# Altium PCB probe.PcbDoc
Units mil, origin at the board's own origin, x right, y up, seen from the top; angles counter-clockwise.
Board outline 629.92 x 1850.39 mil, 4 copper layers (Top Layer, Internal Plane 1, Internal Plane 2, Bottom Layer), stack 29.834 mil thick; 42 components, 18 nets, 114 pads, 94 vias.
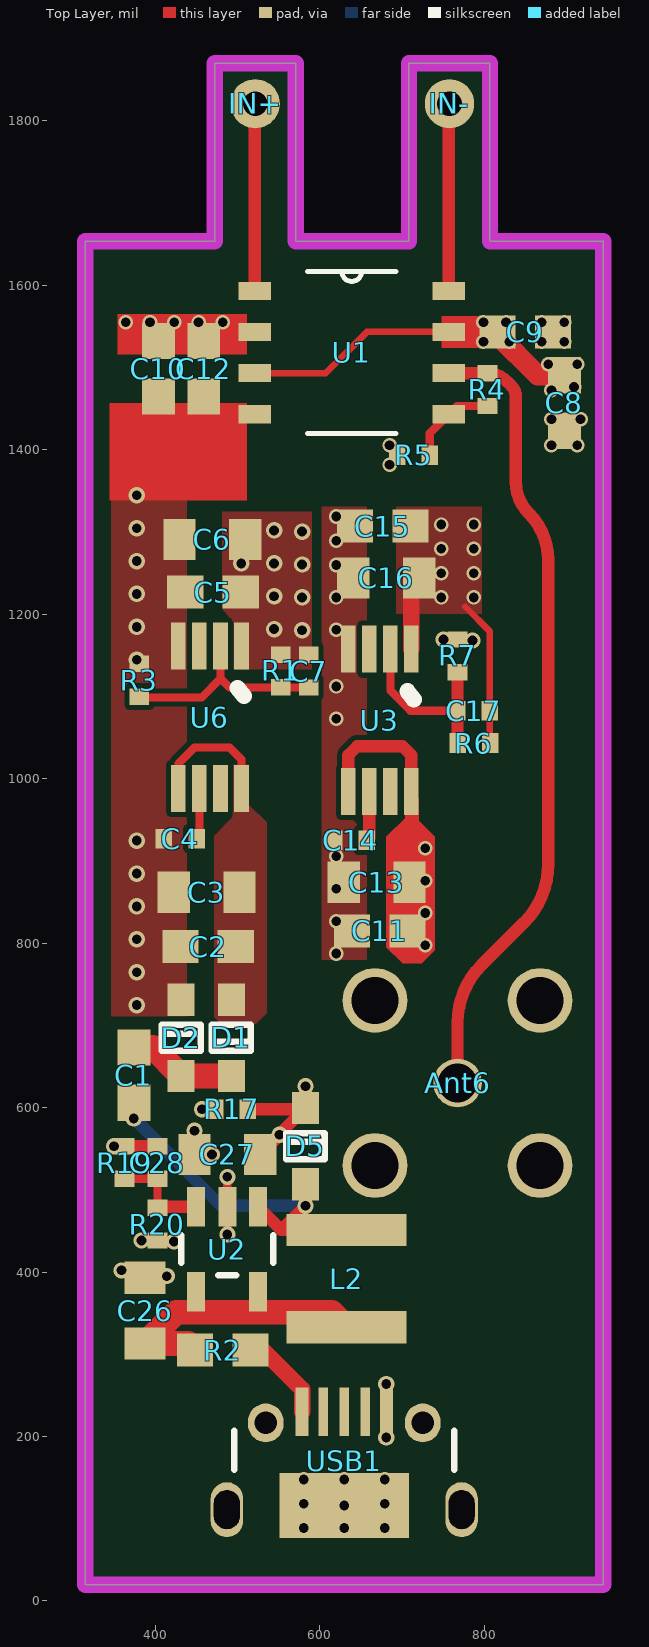
[diagram p0: Top Layer view]
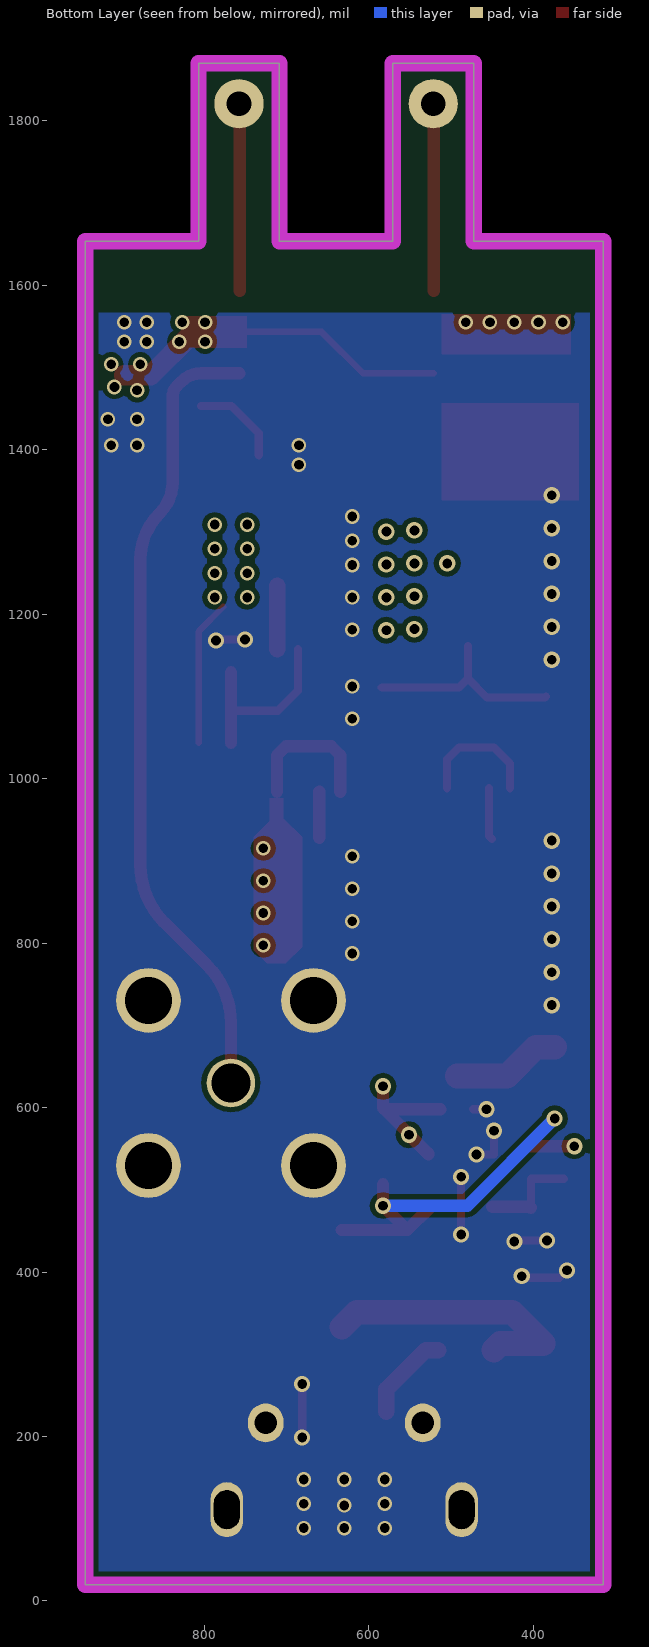
[diagram p1: Bottom Layer view, seen from below]
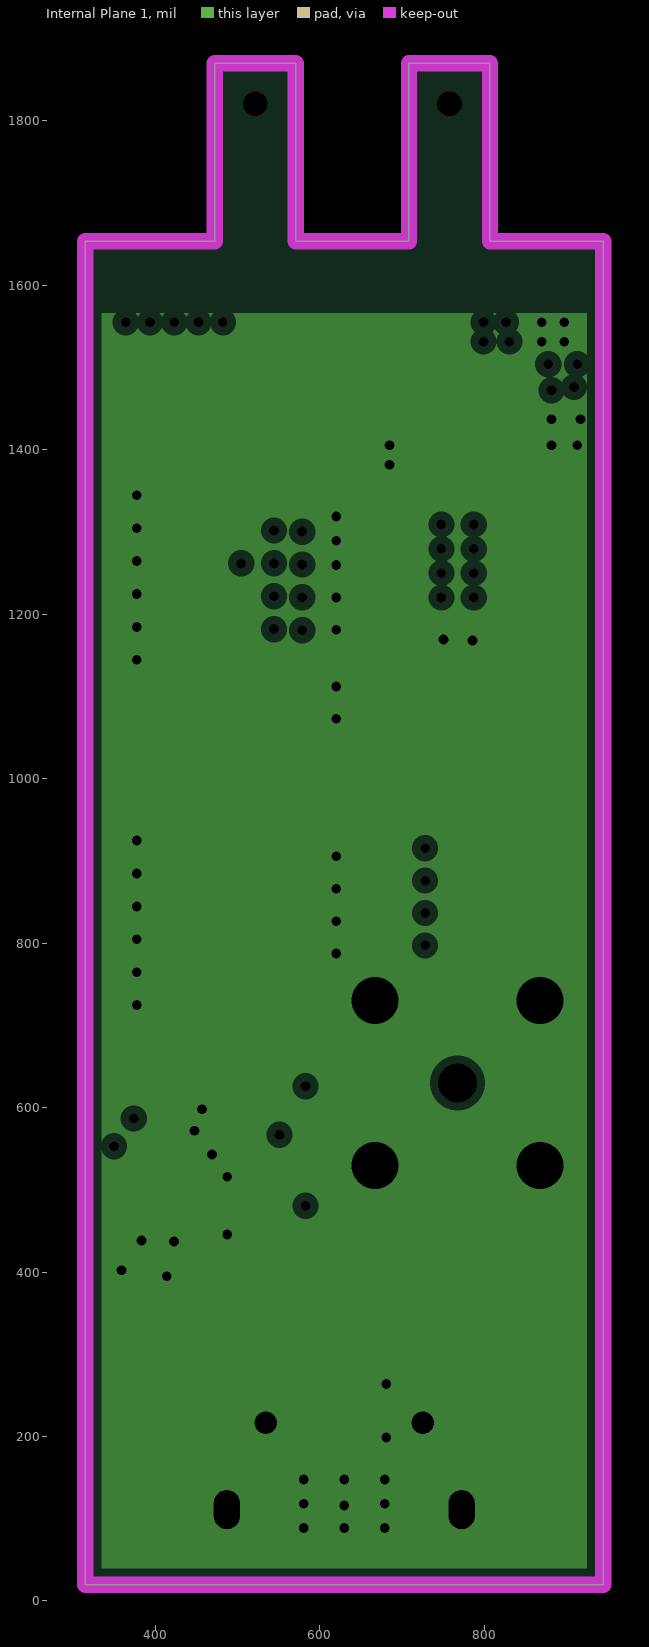
[diagram p2: Internal Plane 1, clearances drawn from the general rule]
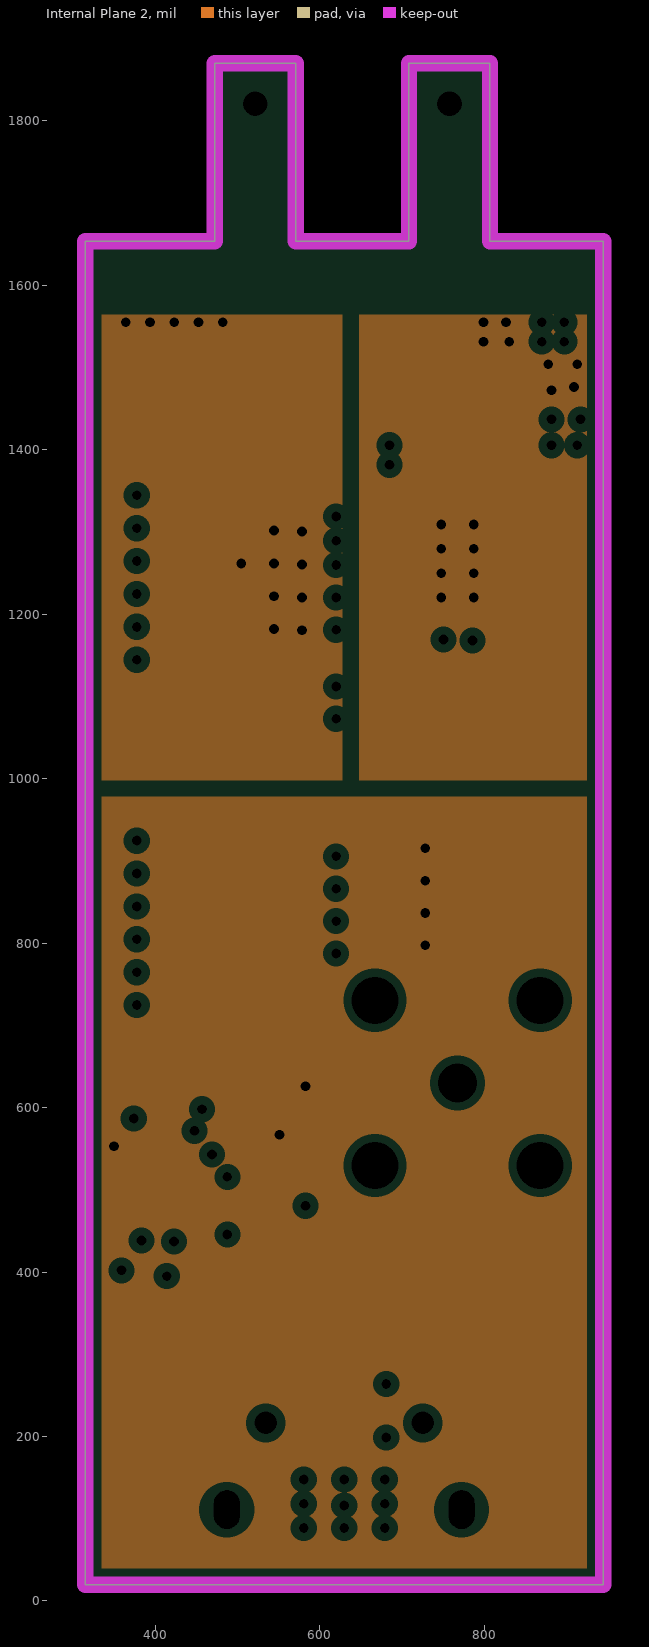
[diagram p3: Internal Plane 2, clearances drawn from the general rule]

## Layer stack, top to bottom
Top Solder: solder mask 0.4, Solder Resist, Dk 3.8
Top Layer: signal copper 1.4
Dielectric 1: prepreg 7.1, Dk 4.6
Internal Plane 1: plane copper 1.417, net GND
Dielectric 3: core 10, Dk 4.6
Internal Plane 2: plane copper 1.417, net (Multiple Nets)
Dielectric 4: prepreg 7.1, Dk 4.6
Bottom Layer: signal copper 1.4
Bottom Solder: solder mask 0.4, Solder Resist, Dk 3.8

## Board outline
314.96,19.68 314.96,1653.54 472.44,1653.54 472.44,1870.08 570.87,1870.08 570.87,1653.54 708.66,1653.54 708.66,1870.08 807.09,1870.08 807.09,1653.54 944.88,1653.54 944.88,19.68

## Design rules (kind name [scope] priority, off if disabled: settings)
Clearance [All] p1: gap=6 ignorepadtopadclearanceinfootprint=FALSE except(0: Arc-Hole Track-Hole SMDPad-Hole THPad-Hole Via-Hole Fill-Hole Poly-Hole Region-Hole Text-Hole)
DiffPairsRouting [All] p1: maxlimit=10 minlimit=10 mostfreqgap=10 toplayer_minwidth=5.98 toplayer_maxwidth=15 toplayer_prefwidth=15 bottomlayer_minwidth=5.98 bottomlayer_maxwidth=15 bottomlayer_prefwidth=15 maxuncoupledlength=500
MinimumSolderMaskSliver [All] p1 off: minsoldermaskwidth=10
PlaneClearance [All] p1: clearance=10
PlaneConnect [All] p1: planeconnectstyle=Direct reliefexpansion=20 reliefentries=4 reliefconductorwidth=10 reliefairgap=10
PolygonConnect [All] p1: connectstyle=Direct reliefconductorwidth=10 reliefentries=4 polygonreliefangle="90 Angle" airgapwidth=10
RoomDefinition ad8130 [InComponentClass('ad8130')] p1 off: confinementstyle=ConfineIn formatcopy=TRUE lockcomponents=FALSE outline -2997.76,-3067.09 -997.76,-3067.09 -997.76,-2067.09 -2997.76,-2067.09
RoomDefinition power [InComponentClass('power')] p2 off: confinementstyle=ConfineIn formatcopy=TRUE lockcomponents=FALSE outline 2012.24,72.91 4357.24,72.91 4357.24,312.91 2012.24,312.91
RoutingVias [All] p1: holewidth=12 width=20 viastyle="Through Hole" minholewidth=11.81 minwidth=19.68 maxholewidth=28 maxwidth=50
SilkToBoardRegionClearance [All] p1 off:
SilkToSilkClearance [All] p1 off: silktosilkclearance=10
SilkToSolderMaskClearance [IsPad] p1 off: minsilkscreentomaskgap=10 clearancetoexposedcopper=TRUE
SolderMaskExpansion [All] p1: expansion=4
Width [All] p1: maxlimit=60 minlimit=6 preferedwidth=6
23 further rules are at their usual default settings.

## Classes and differential pairs
component class ad8130: Ant6 IN+ IN- R4 R5 U1
component class power: C1 C2 C3 C4 C5 C6 C7 C8 C9 C10 C11 C12 C13 C14 C15 C16 C17 C26 C27 C28 D1 D2 D5 L2 R1 R2 R3 R4 R6 R7 R17 R19 R20 U2 U3 U6 USB1

## Components (designator, comment, footprint, x,y, rotation, side; value= is the part's Value field where it differs from the comment)
Ant6 "Antenna" SMA-HOLE 767.72,629.92 r0 top
C1 "1uF" 0603 374.02,639.76 r270 top
C2 "0.1uF" 0603 464.61,795.89 r180 top
C3 "10uF" 0805 462.61,861.89 r0 top
C4 "10nF" 0402 430.61,926.89 r180 top
C5 "0.1uF" 0603 470.61,1226.89 r180 top
C6 "10uF" 0805 469.61,1290.89 r0 top
C7 "10nF" 0402 586.61,1130.89 r270 top
C8 "2.2uF" 0603 897.64,1456.69 r90 top
C9 "2.2uF" 0603 850.39,1543.31 r180 top
C10 "2.2uF" 0603 404.02,1498.27 r90 top
C11 "0.1uF" 0603 673.23,814.96 r180 top
C12 "2.2uF" 0603 459.02,1498.27 r90 top
C13 "10uF" 0805 669.29,874.02 r0 top
C14 "10nF" 0402 637.8,925.2 r180 top
C15 "0.1uF" 0603 677.17,1307.09 r180 top
C16 "10uF" 0805 681.1,1244.09 r0 top
C17 "10nF" 0402 787.4,1082.68 r180 top
C26 "2.2uF" 0805 387.76,353.03 r270 top
C27 "2.2uF" 0805 487.76,543.03 r0 top
C28 "470pf" 0402 402.76,533.03 r90 top
D1 "Diode 1N4148" LC-SOD-323 492.61,684.89 r90 top
D2 "Diode 1N4148" LC-SOD-323 431.61,684.89 r270 top
D5 "Diode 1N4148" LC-SOD-323 582.76,553.03 r270 top
IN+ "TestPad" TestPad 521.65,1820.87 r90 top
IN- "TestPad" TestPad 757.87,1820.87 r90 top
L2 "Inductor Iron Dot" L4015 632.76,333.03 r90 top value=10uH
R1 "17k" 0402 552.61,1130.89 r90 top
R2 "FB" 0603 482.28,305.12 r180 top
R3 "10k" 0402 380.61,1119.89 r270 top
R4 "0R" 0402 804.02,1473.27 r270 top
R5 "NC" 0402 714.02,1393.27 r0 top
R6 "17k" 0402 787.4,1043.31 r0 top
R7 "10k" 0402 767.72,1149.61 r270 top
R17 "" 0402 492.76,598.03 r0 top value=10k
R19 "" 0402 362.76,533.03 r90 top value=10k
R20 "" 0402 402.76,458.03 r90 top value=10k
U1 "AD8130" SO8 639.02,1518.27 r0 top
U2 "LM27313XMF/NOPB" SOT23-5 487.76,428.03 r180 top value=Value
U3 "tps7a4901" MSOP8/VSSOP8 673.23,1070.87 r270 top
U6 "tps7a3001" MSOP8/VSSOP8 466.61,1074.89 r270 top
USB1 "USB Micro Type B" MICRO-YZX 629.92,0 r0 top

## Footprints (in the part's own frame and the unit in brackets; to place one, negate y for a bottom-side part, rotate by r counter-clockwise, add the part's x,y. Pads: shape width x height; smd on the part's side, far side on the other; paste and mask are expansions set on the pad)
0402 [mil] "0402-RES"
  rect 20x24 smd: 1(-19.69,0) 2(20,0)
0603 [mil] "0603-RES"
  rect 44x40 smd: 1(-33.46,0) 2(34,0)
0805 [mil]
  rect 39.37x50 smd: 1(-40,0) 2(40,0)
  body extent -50,-30 50,30, height 31
L4015 [mm]
  rect 1x3.7 smd: 1(0,0) 2(3,0)
LC-SOD-323 [mm]
  rect 1x0.83 smd: 1(1.18,0) 2(-1.18,0)
  silkscreen extent -0.4,-0.6 0.4,0.6, body extent -1.35,-0.62 1.35,0.63, height 1.1
MICRO-YZX [mm]
  rect 0.4x1.5 smd: 1(-1.3,5.85) 5(1.3,5.85)
  rect 0.3x1.5 smd: 2(-0.65,5.85) 3(0,5.85) 4(0.65,5.85)
  oval 1x1.7 hole 0.8 slot 1.2 at 90 deg: 5(-3.625,2.82) 5(3.625,2.82)
  oval 1.1x1.2 hole 0.7: 5(-2.425,5.5) 5(2.425,5.5)
  rect 4x2 smd: 5(0,2.95)
  silkscreen extent -3.4,4.05 3.4,5.25, body extent -4.02,0.33 3.98,5.93, height 2.6
MSOP8/VSSOP8 [mm]
  rect 1.45x0.45 smd: 1(-2.2,0.975) 2(-2.2,0.325) 3(-2.2,-0.325) 4(-2.2,-0.975) 5(2.2,-0.975) 6(2.2,-0.325) 7(2.2,0.325) 8(2.2,0.975)
  silkscreen extent -0.9,0.85 -0.65,1.05
SMA-HOLE [mm]
  round 1.5 hole 1.2: 1(0,0)
  round 2 hole 1.45: GND(-2.55,-2.55) GND(-2.55,2.55) GND(2.55,-2.55) GND(2.55,2.55)
SO8 [mm]
  rect 1x0.559 smd: 1(-3,1.905) 2(-3,0.635) 3(-3,-0.635) 4(-3,-1.905) 5(3,-1.905) 6(3,-0.635) 7(3,0.635) 8(3,1.905)
  silkscreen extent -1.37,-2.5 1.37,2.5, body extent -3,-2.45 3,2.45, height 1.63
SOT23-5 [mil] "SOT23-5"
  rect 22x48 smd: 1(-37.4,-51.19) 2(0,-51.19) 3(38,-51.19) 4(38,52) 5(-37.4,52)
  silkscreen extent -56,-17 56,32
TestPad [mil]
  round 60 hole 30: 1(0,0)

## Part data
C1 C2 C3 C4 C5 C6 C7 C11 C13 C14 C15 C16 C17: library part Cap, "Capacitor", LatestRevisionDate=17-Jul-2002, LatestRevisionNote="Re-released for DXP Platform.", PackageDescription="Radial Cap, Thru-Hole; 2 Leads; 0.3 in Pin Spacing", PackageReference=RAD-0.3, Published=8-Jun-2000, Publisher="Altium Limited"
C8 C9 C10 C12 C26 C27 C28: library part CAP0402-CAP, "<b>Capacitor</b> / Standard 0603 ceramic capacitor, and 0.1\" leaded capacitor.", PARTNO=CC0402ZRY5V7BB104
D1 D2 D5: "High Conductance Fast Diode", Code_JEDEC=DO-204-AH, ComponentLink1Description="Manufacturer Link", ComponentLink1URL=http://www.fairchildsemi.com/, ComponentLink2Description=Datasheet, ComponentLink2URL=http://www.fairchildsemi.com/ds/1N%2F1N4148.pdf, DatasheetVersion=1997, LatestRevisionDate=17-Jul-2002, LatestRevisionNote="Re-released for DXP Platform.", PackageDescription="Diode, Axial; Body 3.8 x 1.9 mm (LxDia. max), Lead Dia. 0.53 mm (max)", PackageReference=DO-35, Published=8-Jun-2000, Publisher="Altium Limited"
L2: "Magnetic-Core Inductor with Winding Polarity Marking", LatestRevisionDate=17-Jul-2002, LatestRevisionNote="Re-released for DXP Platform.", PackageDescription="Diode; 2 Leads", PackageReference=DIODE_SMC, Published=24-Mar-1999, Publisher="Altium Limited"
R1 R2 R3 R4 R5 R6 R7 R17 R19 R20: library part Res2, "Resistor", LatestRevisionDate=17-Jul-2002, LatestRevisionNote="Re-released for DXP Platform.", PackageDescription="Axial Device, Thru-Hole; 2 Leads; 0.4 in Pin Spacing", PackageReference=AXIAL-0.4, Published=8-Jun-2000, Publisher="Altium Limited"
U2: "Imported", Manufacturer="Texas Instruments", CompType=IC, MountType=SMT, PackageReference=DBV0005A, PartNumber=LM27313XMF/NOPB, PIN_COUNT=5, RefDes=RefDes, RoHS=Y, Type=DEV
U3: library part tps7a3001
USB1: library part USB_Micro_TypeB, "Connector SMD USB Micro Type B middle mount", Manufacturer 1="Molex Inc", Manufacturer Part Number 1=47491-0001, Package / Case=SMD, Supplier Part Number 1=WM17142CT-ND, SCDType=undef, Supplier 1=Digi-Key

## Via types
v1: diameter 17.72, hole 11.81, Top Layer to Bottom Layer, 55 vias
v2: diameter 20, hole 12, Top Layer to Bottom Layer, tented both sides, 21 vias
v3: diameter 19.68, hole 11.81, Top Layer to Bottom Layer, 18 vias

## Nets (pads, with @x,y where several pads share a name; then routed paths per layer and width w, separated by ;. In a path a pad name is that pad's centre, name@x,y a point inside that pad or via, vN(x,y) a via of type N, cw(c..) or ccw(c..) an arc to the next point about the centre after c; other vN are vias at no path point)
5V: C8.2 C9.2 C15.1 C16.2 C17.1 R6.2 U1.3 U1.7 U3.1 | length 617.2
  Top Layer w8: U1.3 607.44,1493.27 657.48,1543.31 757.09,1543.31 U1.7 ; 777,1209 807.09,1178.91 C17.1 R6.2@807.09,1043.62
  Top Layer w20: U3.1 C16.2@711.61,1234.61
  Top Layer w25: C9.2 816.39,1539.51 865.21,1490.69 C8.2
  other v1: 748.03,1220.47 787.4,1220.47 748.03,1250 787.4,1250 748.03,1279.53 787.4,1279.53 748.03,1309.06 787.4,1309.06 881.89,1472.44 909.45,1476.38 877.95,1503.94 913.39,1503.94 799.21,1531.5 830.71,1531.5 799.21,1555.12 826.77,1555.12
6V: C11.1 C13.2 C27.2 C28.2 D5.2 R17.2 R19.2 U3.5 U3.8 | length 433.4
  Top Layer w15: v3(350.03,553.03) R19.2 C28.2 ; R17.2 D5.2@581.3,598.03 ; C27.2 551.18,566.46 v3(551.18,566.93) ; C27.2@527.76,544.49 D5.2@581.3,598.03 ; v3(582.76,625.91) D5.2 D5.2@581.3,598.03 ; U3.5 634.84,1028.54 645.67,1039.37 700.79,1039.37 711.61,1028.54 U3.8
  other v1: 728.35,797.24 728.35,836.61 728.35,875.98 728.35,915.35
-3.3V: C5.1 C6.2 C7.1 C10.2 C12.2 R1.2 U1.2 U6.1
  other v1: 364.17,1555.12 393.7,1555.12 423.23,1555.12 452.76,1555.12 482.28,1555.12
  other v2: 578.74,1180.47 544.61,1181.89 578.74,1220.47 544.61,1221.89 578.74,1260.47 504.61,1261.89 544.61,1261.89 578.74,1300.47 544.61,1301.89
GND: Ant6.GND C2.2 C3.1 C4.2 C5.2 C6.1 C8.1 C9.1 C10.1 C11.2 C12.1 C13.1 C14.2 C15.2 C16.1 C26.1 C27.1 D2.2 R3.1 R5.1 R7.1 R17.1 R20.1 U1.4 U2.2 U3.4 U6.4 USB1.5 | length 336.6
  Top Layer w10: v3(359,402) 367.97,393.03 C26.1 412.03,393.03 v3(414,395) ; v3(383.35,438.35) R20.1 421.65,438.35 v3(423,437) ; v3(447.76,571.76) C27.1 v3(469.03,543.03) ; v3(457.03,598.03) R17.1 ; v3(487.76,445.76) U2.2 v3(487.76,515.76) ; v3(681.1,198.82) 681.1,230.32 v3(681.1,263.78) ; v3(750.71,1169.29) R7.1 784.71,1169.29 v3(786,1168)
  other v1: 580.71,88.58 629.92,88.58 679.13,88.58 629.92,116.14 580.71,118.11 679.13,118.11 580.71,147.64 629.92,147.64 679.13,147.64 620.08,787.4 620.08,826.77 620.08,866.14 620.08,905.51 620.08,1072.83 620.08,1112.2 620.08,1181.1 620.08,1220.47 620.08,1259.84 620.08,1289.37 620.08,1318.9 685.04,1381.89 685.04,1405.51 881.89,1405.51 913.39,1405.51 881.89,1437.01 917.32,1437.01 870.08,1531.5 897.64,1531.5 870.08,1555.12 897.64,1555.12
  other v2: 377.52,724.65 377.52,764.65 377.52,804.65 377.52,844.65 377.52,884.65 377.52,924.65 377.52,1144.65 377.52,1184.65 377.52,1224.65 377.52,1264.65 377.52,1304.65 377.52,1344.65
NetAnt6_1: Ant6.1 R4.1 U1.6 | length 977.5
  Top Layer w15: U1.6@757.44,1492.95 R4.1 cw(c804.02,1459.02) 828.01,1483.01 833.01,1478.01 cw(c819.57,1464.57) 838.58,1464.57 838.58,1360.85 ccw(c892.35,1360.85) 854.33,1322.83 cw(c797.3,1265.81) 877.95,1265.81 877.95,895.75 cw(c777.95,895.75) 848.66,825.04 797.01,773.38 ccw(c867.72,702.67) 767.72,702.67 Ant6.1
NetC1_1: C1.1 D1.2 D2.1 | length 133.6
  Top Layer w30: C1.1 396.81,673.23 D2.1 D1.2 D1.2@492.15,638.89
NetC2_1: C2.1 C3.2 D1.1 U6.5 U6.8 | length 156.2
  Top Layer w10: U6.5 428.22,1018.5 447.61,1037.89 490.61,1037.89 504.99,1023.5 U6.8
NetC4_1: C4.1 U6.6 | length 62.8
  Top Layer w10: C4.1 453.81,930.41 U6.6
NetC7_2: C7.2 R1.1 R3.2 U6.2 | length 253.9
  Top Layer w10: R3.2@384.61,1099.89 385.61,1098.89 456.61,1098.89 479.4,1121.69 ; U6.2 479.4,1121.69 ; C7.2@584.35,1110.76 549.67,1110.76 490.32,1110.76 479.4,1121.69
NetC14_1: C14.1 U3.6 | length 56.1
  Top Layer w15: C14.1@660.43,928.15 U3.6
NetC17_2: C17.2 R6.1 R7.2 U3.2 | length 228.2
  Top Layer w10: U3.2 686.02,1106.98 710.32,1082.68 C17.2
  Top Layer w15: R6.1 R7.2
NetC28_1: C28.1 R19.1 R20.2 U2.3 | length 122.8
  Top Layer w10: R19.1 C28.1 R20.2
  Top Layer w15: R20.2 403.94,479.22 U2.3
NetIN+_1: IN+.1 U1.1 | length 226.9
  Top Layer w15: U1.1 IN+.1@520.91,1820.12
NetIN-_1: IN-.1 U1.8 | length 226.9
  Top Layer w15: U1.8 IN-.1@757.13,1820.12
NetR2_1: R2.1 USB1.1 | length 109.8
  Top Layer w20: R2.1 530.88,305.12 578.74,257.26 USB1.1
NetR4_2: R4.2 R5.2 U1.5 | length 110.6
  Top Layer w10: R5.2 734.02,1420.16 U1.5 767.13,1453.27 R4.2
SW: C1.2 D5.1 L2.2 U2.1 | length 439.5
  Top Layer w15: U2.1 553.23,451.14 ; D5.1 v3(582.76,480.66) 553.23,451.14 ; L2.2 553.23,451.14
  Bottom Layer w15: v3(374.02,586.61) 479.97,480.66 v3(582.76,480.66)
VSYS: C26.2 L2.1 R2.2 U2.4 U2.5 | length 332
  Top Layer w30: R2.2 440.37,313.03 C26.2 425.72,351 614.79,351 L2.1
pads on no net: U3.3 U3.7 U6.3 U6.7 USB1.2 USB1.3 USB1.4

## Polygon pours and split planes (outlines as drawn)
5V on Top Layer "5V_L01_P038" (solid, remove dead copper, pour order 38): 692.91,1330.71 692.91,1200.79 797.24,1200.79 797.24,1330.71
GND on Top Layer "GND_L01_P036" (solid, remove dead copper, pour order 36): 602.36,779.53 657.48,779.53 657.48,1330.71 602.36,1330.71
GND on Top Layer "Bottom Layer-No Net" (solid, remove dead copper, pour order 32): 346.61,710.89 346.61,1320.89 346.61,1355.89 429.61,1355.89 438.61,1355.89 438.61,710.89
-3.3V on Top Layer "Bottom Layer-No Net" (solid, remove dead copper, pour order 20): 495.61,1132.89 495.61,1189.89 481.61,1206.89 481.61,1324.89 590.55,1324.89 590.55,1132.89
NetC2_1 on Top Layer "Bottom Layer-No Net" (solid, remove dead copper, pour order 18): 494.61,1016.89 494.61,953.89 471.61,930.89 471.61,709.89 479.61,701.89 518.61,701.89 522.61,701.89 535.61,714.89 535.61,946.89 514.61,967.89 513.61,968.89 513.61,1016.89
GND on Bottom Layer "Bottom Layer-No Net" (solid, remove dead copper, pour order 34): 314.58,1566.93 944.88,1566.93 944.88,19.68 314.96,19.68
GND on Internal Plane 1 (split plane): 924.79,39.78 335.06,39.78 335.06,1566.93 924.79,1566.93
-3.3V on Internal Plane 2 (split plane): 627.87,1564.71 627.87,998.12 335.06,998.12 335.06,1564.96 627.9,1564.96
5V on Internal Plane 2 (split plane): 924.79,998.12 647.72,998.12 647.72,1564.71 647.69,1564.96 924.79,1564.96
6V on Internal Plane 2 (split plane): 924.79,39.78 335.06,39.78 335.06,978.26 924.79,978.26

## Keep-outs
Keep-Out Layer:
  the board outline again, w19.68

## Other copper
Top Layer:
  rectangle net 5V: 748.03,1523.62 826.77,1562.99
  rectangle net GND: 344.49,1338.58 511.81,1456.69
  rectangle net -3.3V: 354.33,1515.75 511.81,1564.96
  region net 6V: 704,976.38 704,952.03 681.1,929.13 681.1,795.28 700.79,775.59 724.41,775.59 740.16,791.34 740.16,929.13 720.47,948.82 720.47,976.38
Internal Plane 1 (plane layer: these items are gaps in the copper):
  rectangle: 314.96,1566.93 944.88,1874.02
Internal Plane 2 (plane layer: these items are gaps in the copper):
  rectangle: 314.96,1564.96 944.88,1874.02
  lines w19.68: 314.96,988.19 944.88,988.19 ; 637.8,988.19 637.8,1564.71